# Altium PCB nrf24l01_cell.PcbDoc
Units mm, origin at the board's own origin, x right, y up, seen from the top; angles counter-clockwise.
Board outline 12 x 28 mm, 2 copper layers (TopLayer, BottomLayer); 13 components, 18 nets, 70 pads, 26 vias.
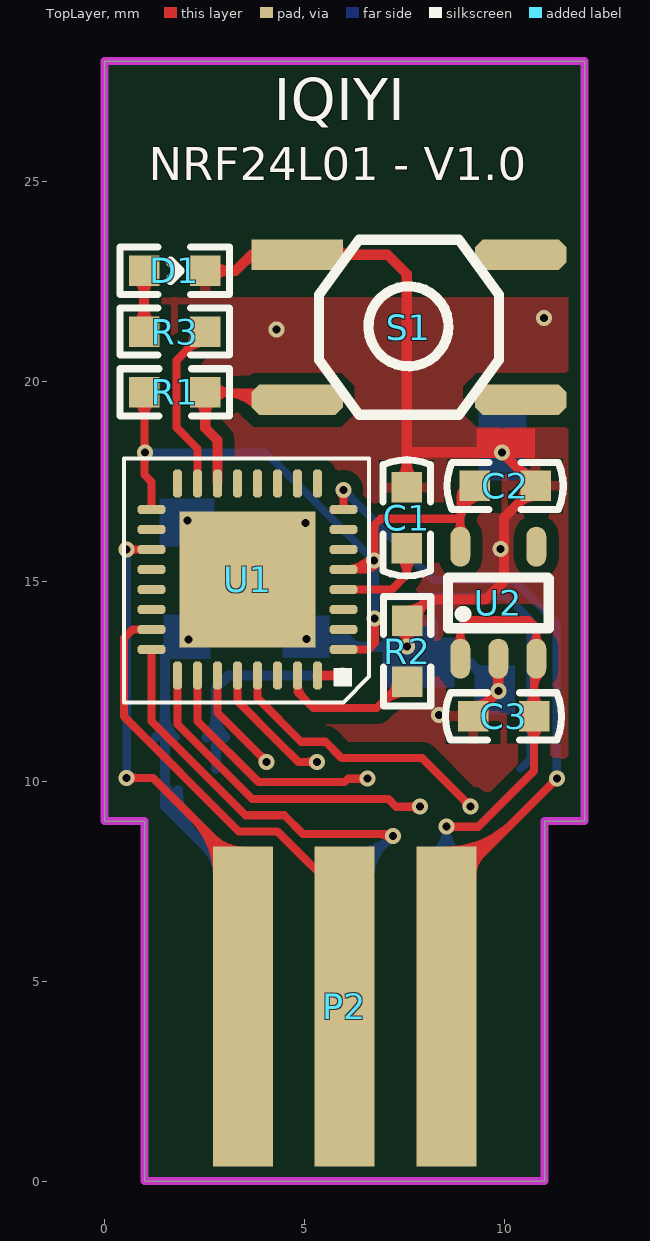
[diagram p0: TopLayer view]
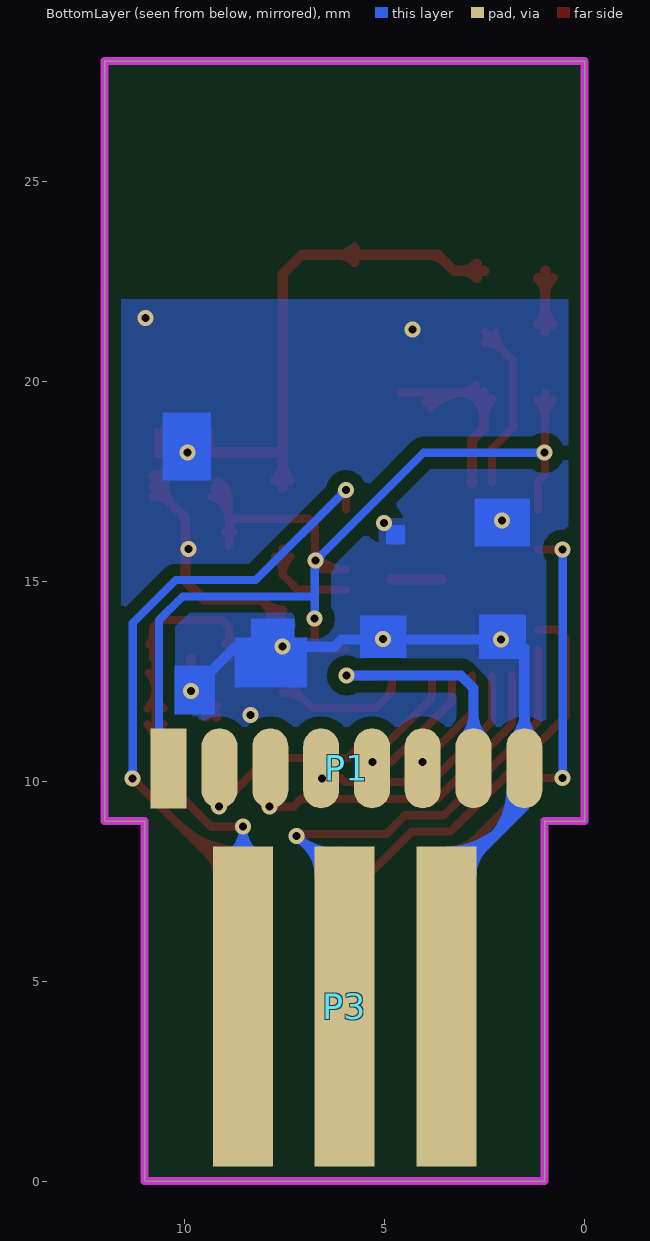
[diagram p1: BottomLayer view, seen from below]

## Layer stack, top to bottom
TopLayer: signal copper 0.0356
Dielectric: prepreg 0.32, FR-4, Dk 4.8
BottomLayer: signal copper 0.0356

## Board outline
0,9 0,28 12,28 12,9 11,9 11,0 1,0 1,9

## Design rules (kind name [scope] priority, off if disabled: settings)
Clearance Clearance_2 [All] p1 off: gap=0.3
Clearance Clearance_0 [All] p2: gap=0.203
ComponentClearance [All] p1: gap=0.1 collisioncheckmode=3 verticalgap=0.1 showdistances=FALSE
FabricationTestPointUsage TestPointUsage [All] p1: valid=0 allowmultiple=FALSE
FabricationTestpoint Testpoint [All] p1: side=3 testpointundercomponent=TRUE minsize=1.016 maxsize=2.54 preferedsize=1.524 minholesize=0.508 maxholesize=1.016 preferedholesize=0.813 testpointgrid=0.025 allowsidetop=TRUE allowsidebottom=TRUE usegrid=TRUE gridtolerance=0
PolygonConnect [All] p1: connectstyle=Relief reliefconductorwidth=0.254 reliefentries=4 polygonreliefangle="90 Angle"
RoutingVias [All] p1: holewidth=0.4 width=0.8 viastyle="Through Hole" minholewidth=0.2 minwidth=0.406 maxholewidth=0.711 maxwidth=1.27
SilkscreenOverComponentPads [All] p1: minsilkscreentomaskgap=0.254
SolderMaskExpansion [All] p1: expansion=0.102
Width [All] p1: maxlimit=5 minlimit=0.203 preferedwidth=0.203 minimp=50.000000 maximp=50.000000 favimp=50.000000
24 further rules are at their usual default settings.

## Components (designator, comment, footprint, x,y, rotation, side; value= is the part's Value field where it differs from the comment)
C1 "104" 1608(0603C) 7.55,15.82 r90 top
C2 "475" 1608(0603C) 9.25,17.38 r0 top
C3 "104" 1608(0603C) 9.21,11.62 r0 top
D1 "LED_RED" LED-0603R 2.51,22.76 r180 top
P1 "NRF24L01" SSSIP8X_N 10.4,10.32 r90 bottom
P2 "" SIPP3X 3.46,4.37 r0 top
P3 "" SIPP3X 3.46,4.37 r0 bottom
R1 "10K" 1608(0603R) 0.99,19.72 r0 top
R2 "10K" 1608(0603r) 7.56,12.49 r90 top
R3 "1K" 1608(0603R) 2.51,21.24 r180 top
S1 "SW-PB" KEY-3 4.81,23.16 r0 top
U1 "STM32L051K8U6" UFQFPN32 5.97,13.29 r180 top
U2 "MIC5205-3.3BM5 (LB33)" SOT23-5 8.89,13.06 r90 top

## Footprints (in the part's own frame and the unit in brackets; to place one, negate y for a bottom-side part, rotate by r counter-clockwise, add the part's x,y. Pads: shape width x height; smd on the part's side, far side on the other; paste and mask are expansions set on the pad)
1608(0603C) [mil]
  rect 30x30 smd: 1(0,0) 2(60,0)
  silkscreen extent -27,-23 87,23
1608(0603R) [mil]
  rect 30x30 smd: 1(0,0) 2(60,0)
  silkscreen extent -24,-23 84,23
1608(0603r) [mil]
  rect 30x30 smd: 1(0,0) 2(60,0)
  silkscreen extent -24,-23 84,23
KEY-3 [mil]
  rect 90x30 smd: 1(0,0)
  oct 90x30 smd: 2(0,-142.89) 3(220,-0.02) 4(220,-142.89)
  silkscreen extent 22,-158 199,15
LED-0603R [mil]
  rect 30x30 smd: A(60,0) K(0,0)
  silkscreen extent -24,-23 84,23
SIPP3X [mm]
  rect 1.5x8 smd: 1(0,0) 2(2.54,0) 3(5.08,0)
SOT23-5 [mm]
  oval 1x0.5 smd: 1(0,0) 2(0,-0.95) 3(0,-1.9) 4(2.8,-1.9) 5(2.8,0)
  silkscreen extent 0.76,-2.21 2.03,0.3
SSSIP8X_N [mm]
  rect 2x0.9 smd: 1(0,0)
  oval 2x0.9 smd: 2(0,-1.27) 3(0,-2.54) 4(0,-3.81) 5(0,-5.08) 6(0,-6.35) 7(0,-7.62) 8(0,-8.89)
UFQFPN32 [mm]
  oct 0.7x0.23 smd: 1(0,0) 2(0,-0.5) 3(0,-1) 4(0,-1.5) 5(0,-2) 6(0,-2.5) 7(0,-3) 8(0,-3.5) 17(4.8,-3.5) 18(4.8,-3) 19(4.8,-2.5) 20(4.8,-2) 21(4.8,-1.5) 22(4.8,-1) 23(4.8,-0.5) 24(4.8,0)
  oct 0.23x0.7 smd: 9(0.65,-4.15) 10(1.15,-4.15) 11(1.65,-4.15) 12(2.15,-4.15) 13(2.65,-4.15) 14(3.15,-4.15) 15(3.65,-4.15) 16(4.15,-4.15) 25(4.15,0.65) 26(3.65,0.65) 27(3.15,0.65) 28(2.65,0.65) 29(2.15,0.65) 30(1.65,0.65) 31(1.15,0.65) 32(0.65,0.65)
  rect 3.4x3.4 smd: 33(2.4,-1.75)
  silkscreen extent -0.64,-4.77 5.49,1.32

## Part data
C1 C2: library part CAP, "Capacitor"
C3: library part Cap, "Capacitor"
D1: library part LED
P1: library part "Header 8", "Header, 8-Pin"
P2 P3: library part "Header 3", "Header, 3-Pin"
R1 R2 R3: library part Res2, "Resistor"
S1: "Switch"
U2: library part MIC5205

## Via types
v1: diameter 0.4, hole 0.2, TopLayer to BottomLayer, tented both sides, 26 vias

## Nets (pads, with @x,y where several pads share a name; then routed paths per layer and width w, separated by ;. In a path a pad name is that pad's centre, name@x,y a point inside that pad or via, vN(x,y) a via of type N, cw(c..) or ccw(c..) an arc to the next point about the centre after c; other vN are vias at no path point)
BOOT0: R2.1 U1.31 | length 5.1
  TopLayer w0.203: U1.31 4.82,12.224 5.214,11.83 6.8,11.83 R2.1@7.56,12.59 ; U1.31@4.833,12.405 ccw(c5.302,12.405) 4.971,12.073 ; 6.912,11.942 cw(c7.56,11.295) R2.1@7.56,12.211 ; 7.154,12.184 ccw(c6.847,12.49) R2.1@7.281,12.49
DGND: C1.2 C2.2 C3.1 D1.K P1.8 P3.1 R2.2 S1.1 U1.33 U2.2 | length 55
  TopLayer w0.254: D1.K 3.27,22.76 3.67,23.16 S1.1 7.07,23.16 7.55,22.68 7.55,18.22 ; D1.K@2.69,22.58 cw(c3.123,22.147) 3.123,22.76 cw(c3.123,23.373) D1.K@2.69,22.94 ; 3.46,22.95 cw(c3.976,22.435) S1.1@4.048,23.16 ; U1.33 U1.33@4.84,15.04 ; S1.1@5.752,22.98 cw(c6.185,22.547) 6.185,23.16 cw(c6.185,23.773) S1.1@5.752,23.34 ; C1.2@7.37,17.524 ccw(c6.937,17.957) 7.55,17.957 ccw(c8.163,17.957) C1.2@7.73,17.524 ; R2.2@7.38,13.834 cw(c6.947,13.401) 7.56,13.401 cw(c8.173,13.401) R2.2@7.74,13.834 ; C1.2 7.55,18.22 ; v1(7.56,13.36) R2.2 8.086,14.54 9.52,14.54 9.98,15 9.98,16.586 C2.2 v1(9.934,18.22) 7.55,18.22 ; R2.2@7.56,14.268 ccw(c7.56,14.881) 7.994,14.448 ccw(c8.427,14.014) R2.2@7.814,14.014 ; C3.1 v1(9.84,12.25) U2.2 ; C3.1@9.21,11.874 ccw(c9.21,12.487) 9.644,12.054 ccw(c10.077,11.62) C3.1@9.464,11.62 ; U2.2@9.753,12.723 cw(c9.543,12.513) 9.84,12.513 cw(c10.137,12.513) U2.2@9.927,12.723 ; C2.2@10.774,17.126 ccw(c10.774,16.513) 10.34,16.946 ccw(c9.907,17.38) 10.52,17.38 ccw(c9.907,17.38) 10.34,17.814 ccw(c10.774,18.247) C2.2@10.774,17.634
  BottomLayer w0.254: P1.8@1.282,11.098 ccw(c0.73,11.65) 1.51,11.65 ccw(c2.29,11.65) P1.8@1.738,11.098 ; P1.8@1.579,9.77 ccw(c2.711,9.77) 1.911,8.969 ; P1.8@1.833,9.77 ccw(c3.578,9.77) 2.344,8.536 ; 2.055,8.825 ccw(c3.46,10.23) P3.1@3.46,8.243 ; 2.489,8.391 ccw(c3.46,9.363) P3.1@3.46,7.989 ; 2.538,8.342 cw(c1.816,7.62) P3.1@2.837,7.62 ; P3.1@3.275,7.605 1.51,9.37 P1.8 1.51,13.33 1.72,13.54 v1(2.09,13.54) 6.08,13.54 6.26,13.36 v1(7.56,13.36) 8.73,13.36 v1(9.84,12.25) ; 4.84,13.54 ccw(c4.84,13.75) v1@4.988,13.602 ; v1@5.092,13.602 ccw(c5.24,13.75) 5.24,13.54
  other v1: 8.36,11.65 5.04,13.55 9.9,15.8 5.02,16.45 2.07,16.52 4.3,21.29 10.98,21.58
DVDD3.3: C2.1 P1.1 R1.1 U1.1 U1.5 U1.17 U2.5 | length 34
  TopLayer w0.203: R1.1@0.792,19.522 cw(c0.315,19.045) 0.99,19.045 cw(c1.665,19.045) R1.1@1.188,19.522 ; 0.99,17.924 cw(c1.296,17.924) v1@1.08,18.14 ; 0.99,18.496 ccw(c1.296,18.496) v1@1.08,18.28 ; R1.1 0.99,17.66 1.17,17.48 U1.17 ; U1.1 6.59,13.29 6.75,13.45 v1(6.75,14.06) ; 6.455,15.29 ccw(c6.455,15.781) v1@6.805,15.436 ; 6.585,15.315 ccw(c6.455,15.445) v1@6.634,15.488 ; v1@6.66,15.579 cw(c5.97,16.258) U1.5 6.56,15.29 v1@6.74,15.47 ; v1@6.66,15.58 ccw(c6.468,15.772) 6.74,15.772 ; v1@6.68,13.99 cw(c6.512,13.822) 6.75,13.822 cw(c6.988,13.822) v1@6.82,13.99 ; v1@6.74,15.51 6.74,16.41 6.89,16.56 8.89,16.56 ; 6.74,15.723 ccw(c6.943,15.723) v1@6.8,15.58 ; U2.5@8.785,16.215 ccw(c8.532,16.468) 8.89,16.468 ccw(c9.248,16.468) U2.5@8.995,16.215 ; U2.5 8.89,16.56 ; 8.89,16.484 cw(c9.557,16.484) C2.1@9.341,17.116 ; 8.89,16.769 cw(c9.46,16.769) C2.1@9.275,17.308 ; C2.1@8.89,17.054 cw(c9.362,17.054) C2.1@9.209,17.5 ; C2.1 8.89,17.02 8.89,16.56
  BottomLayer w0.203: v1(1.01,18.21) 4.03,18.21 v1(6.73,15.51) 6.75,15.49 6.75,14.62 ; v1@1.08,18.14 cw(c1.248,17.972) 1.248,18.21 cw(c1.248,18.448) v1@1.08,18.28 ; v1@6.632,15.51 ccw(c6.394,15.51) 6.562,15.678 ccw(c6.73,15.846) v1@6.73,15.608 ; v1@6.66,15.44 cw(c6.444,15.224) 6.75,15.224 ; v1@6.68,14.13 ccw(c6.512,14.298) 6.75,14.298 ccw(c6.988,14.298) v1@6.82,14.13 ; v1(6.75,14.06) 6.75,14.62 ; P1.1 10.64,10.56 10.64,14.03 10.05,14.62 6.75,14.62
KEY_1: R1.2 S1.2 U1.14 | length 8.2
  TopLayer w0.203: R1.2 S1.2@4.62,19.72 ; R1.2@2.712,19.522 cw(c3.189,19.045) 3.189,19.72 cw(c3.189,20.395) R1.2@2.712,19.918 ; 2.916,19.72 cw(c2.916,18.398) S1.2@3.85,19.333 ; 3.407,19.72 cw(c3.407,18.889) S1.2@3.994,19.477
  TopLayer w0.254: R1.2@2.334,19.54 cw(c1.901,19.107) 2.514,19.107 cw(c3.127,19.107) R1.2@2.694,19.54 ; R1.2 2.514,18.826 2.82,18.52 U1.14
LED: R3.1 U1.15 | length 5.4
  TopLayer w0.203: R3.1@2.231,21.24 cw(c1.556,21.24) 2.033,20.763 cw(c2.51,20.286) R3.1@2.51,20.961 ; U1.15 2.32,18.31 1.79,18.84 1.79,20.52 R3.1
NetC1_1: C1.1 U1.4 | length 3.4
  TopLayer w0.203: U1.4 7.18,14.79 7.55,15.16 ; C1.1@7.356,15.619 cw(c6.91,15.16) 7.55,15.16 ; C1.1 7.55,15.16 ; C1.1@7.744,15.619 ccw(c8.19,15.16) 7.55,15.16
NetD1_A: D1.A R3.2 | length 3.4
  TopLayer w0.254: R3.2@0.806,21.42 ccw(c0.373,21.853) 0.986,21.853 ccw(c1.599,21.853) R3.2@1.166,21.42 ; D1.A@0.806,22.58 cw(c0.373,22.147) 0.986,22.147 cw(c1.599,22.147) D1.A@1.166,22.58 ; R3.2 D1.A
NRF_CE: P1.2 U1.29 | length 7.4
  TopLayer w0.203: U1.29 3.82,12.075 4.91,10.985 5.519,10.985 5.924,10.58 7.93,10.58 v1(9.14,9.37) ; v1@9.042,9.37 ccw(c8.804,9.37) 8.972,9.538 ccw(c9.14,9.706) v1@9.14,9.468
NRF_CSN: P1.3 U1.25 | length 8.6
  TopLayer w0.203: U1.25 1.82,11.421 3.689,9.553 7.09,9.553 7.283,9.36 v1@7.81,9.36 ; v1@7.81,9.29 ccw(c7.642,9.122) 7.642,9.36 ccw(c7.642,9.598) v1@7.81,9.43 ; v1(7.88,9.36) v1@7.81,9.36 ; v1@7.89,9.28 v1@7.81,9.36
NRF_IRQ: P1.7 U1.32 | length 7.2
  TopLayer w0.254: U1.32 v1(5.95,12.64)
  BottomLayer w0.254: P1.7@2.552,11.098 ccw(c2,11.65) 2.78,11.65 ccw(c3.56,11.65) P1.7@3.008,11.098 ; P1.7 2.78,12.32 3.1,12.64 v1(5.95,12.64)
NRF_MISO: P1.6 U1.27 | length 3
  TopLayer w0.203: U1.27 2.82,11.71 v1(4.05,10.48) ; v1@3.952,10.48 ccw(c3.714,10.48) 3.882,10.648 ccw(c4.05,10.816) v1@4.05,10.578
NRF_MOSI: P1.5 U1.28 | length 3.6
  TopLayer w0.203: U1.28 3.32,12 4.335,10.985 4.84,10.48 v1(5.31,10.48) ; v1@5.24,10.41 ccw(c5.072,10.242) 5.072,10.48 ccw(c5.072,10.718) v1@5.24,10.55
NRF_SCK: P1.4 U1.26 | length 6.4
  TopLayer w0.203: U1.26 2.32,11.496 3.841,9.975 5.995,9.975 6.08,10.06 v1(6.57,10.06) ; v1@6.5,9.99 ccw(c6.332,9.822) 6.332,10.06 ccw(c6.332,10.298) v1@6.5,10.13
POWER: C3.2 P3.3 U2.1 U2.3 | length 20.7
  TopLayer w0.203: v1(8.54,8.86) 9.344,8.86 9.422,8.938 10.734,10.25 C3.2 10.734,13.004 U2.3 10.79,13.84 10.6,14.03 9.06,14.03 8.89,13.86 U2.1 ; v1@8.61,8.79 cw(c8.778,8.622) 8.778,8.86 cw(c8.778,9.098) v1@8.61,8.93 ; U2.1@8.785,13.415 ccw(c8.532,13.668) 8.89,13.668 ccw(c9.248,13.668) U2.1@8.995,13.415 ; C3.2@10.536,11.422 cw(c10.059,10.945) 10.734,10.945 cw(c11.409,10.945) C3.2@10.932,11.422 ; C3.2@10.536,11.818 ccw(c10.059,12.295) 10.734,12.295 ccw(c11.409,12.295) C3.2@10.932,11.818 ; U2.3@10.685,13.415 ccw(c10.432,13.668) 10.79,13.668 ccw(c11.148,13.668) U2.3@10.895,13.415 ; 10.734,12.317 cw(c11.283,12.317) U2.3@10.895,12.705
  BottomLayer w0.203: P3.3@8.185,8.162 ccw(c7.754,8.82) v1@8.54,8.82 ; P3.3@8.296,7.992 ccw(c8,8.444) 8.54,8.444 ccw(c9.08,8.444) P3.3@8.784,7.992 ; v1@8.47,8.79 cw(c8.302,8.622) 8.54,8.622 cw(c8.778,8.622) v1@8.61,8.79 ; P3.3 v1@8.54,8.82 ; P3.3@8.895,8.162 cw(c9.326,8.82) v1@8.54,8.82
SWCLK: P3.2 U1.24 | length 18.1
  TopLayer w0.203: U1.24 1.17,11.497 3.52,9.146 4.488,9.146 4.96,8.675 7.165,8.675 v1(7.21,8.63) ; 6.864,8.675 cw(c6.864,8.284) v1@7.14,8.56
  BottomLayer w0.203: P3.2 6,7.42 v1(7.21,8.63) cw(c6.286,9.554) P3.2@6.095,8.261 ; P3.2@6.035,7.859 ccw(c6.139,8.559) P3.2@6.639,8.059 ; P3.2@6.065,8.06 ccw(c6.213,9.056) 6.924,8.344 ; P3.2@6.648,7.62 cw(c7.731,7.62) 6.965,8.385 ; v1@7.112,8.63 cw(c6.874,8.63) 7.042,8.462 cw(c7.21,8.294) v1@7.21,8.532
SWDIO: P2.2 U1.23 | length 12.8
  TopLayer w0.203: U1.23 0.69,13.79 0.48,13.58 0.48,11.612 3.352,8.74 4.32,8.74 6,7.06 P2.2
TEST: P2.3 U1.8 | length 21.5
  TopLayer w0.203: v1@5.9,17.21 cw(c5.732,17.042) 5.97,17.042 cw(c6.208,17.042) v1@6.04,17.21 ; U1.8 v1(5.97,17.28) ; P2.3@8.54,7.3 v1(11.31,10.07) ; P2.3@8.54,7.862 ccw(c8.54,9.219) 9.499,8.259 ; P2.3@8.54,8.065 ccw(c8.54,9.913) 9.846,8.606 ; P2.3@8.54,8.268 ccw(c8.54,10.606) 10.193,8.953 ; P2.3@9.188,7.62 cw(c9.981,7.62) 9.421,8.181 ; v1@11.212,10.07 cw(c10.974,10.07) 11.142,9.902 cw(c11.31,9.734) v1@11.31,9.972
  BottomLayer w0.203: v1@5.97,17.182 cw(c5.97,16.944) 6.138,17.112 cw(c6.306,17.28) v1@6.068,17.28 ; v1(5.97,17.28) 8.224,15.026 10.224,15.026 11.3,13.95 11.3,10.12 v1@11.25,10.07 ; v1@11.24,10.14 ccw(c11.097,10.283) 11.3,10.283 ; 11.3,10.332 ccw(c11.572,10.332) v1@11.38,10.14
TXD: P2.1 U1.19 | length 16.3
  TopLayer w0.203: v1@0.48,15.79 v1(0.55,15.79) U1.19 ; v1(0.55,10.08) 1.21,10.08 P2.1@3.46,7.83 ; v1@0.62,10.01 cw(c0.788,9.842) 0.788,10.08 cw(c0.788,10.318) v1@0.62,10.15 ; v1@0.62,15.72 cw(c0.788,15.552) 0.788,15.79 cw(c0.788,16.028) v1@0.62,15.86 ; 2.205,9.085 cw(c0.739,7.62) P2.1@2.812,7.62 ; 2.552,8.738 cw(c1.433,7.62) P2.1@3.015,7.62 ; 2.712,8.578 ccw(c3.46,9.327) P2.1@3.46,8.268 ; 2.898,8.392 cw(c2.127,7.62) P2.1@3.218,7.62
  BottomLayer w0.203: v1@0.48,10.15 ccw(c0.312,10.318) 0.55,10.318 ccw(c0.788,10.318) v1@0.62,10.15 ; v1@0.48,15.72 cw(c0.312,15.552) 0.55,15.552 cw(c0.788,15.552) v1@0.62,15.72 ; v1(0.55,10.08) v1(0.55,15.79)
pads on no net: S1.3 S1.4 U1.2 U1.3 U1.6 U1.7 U1.9 U1.10 U1.11 U1.12 U1.13 U1.16 U1.18 U1.20 U1.21 U1.22 U1.30 U2.4

## Polygon pours and split planes (outlines as drawn)
DGND on BottomLayer "TopLayer-No Net" (solid, remove dead copper): 0,9 12,9 12,22.05 0.02,22.05 0,22.07
DGND on TopLayer "TopLayer-No Net" (solid, remove dead copper): 12,22.05 11.95,22.1 0,22.1 0,9 12,9

## Keep-outs
KeepOutLayer:
  the board outline again, w0.2

## Other copper
TopLayer:
  rectangle net DGND: 9.29,18.08 10.76,18.82
BottomLayer:
  rectangle net DGND: 9.34,17.51 10.55,19.21
  rectangle net DGND: 9.24,11.66 10.26,12.89
  rectangle net DGND: 7.26,12.68 8.34,14.07
  rectangle net DGND: 6.94,12.34 8.75,13.59
  rectangle net DGND: 1.47,13.05 2.64,14.16
  rectangle net DGND: 1.37,15.87 2.75,17.06
  rectangle net DGND: 4.45,13.08 5.62,14.14
  rectangle net DGND: 4.49,15.91 4.97,16.4

## Silkscreen, mask and mechanical layers (free items; w line width, h text height)
TopOverlay:
  text "IQIYI" at 4.22,26.17 h1.8
  text "NRF24L01 - V1.0" at 1.1,24.75 h1.4
Mechanical15:
  lines w0.16: 0,9 12,9 12,28 0,28 0,9